# EAGLE board Analog Speed Controller (EAGLE 9.7.0)

Size 176.98 x 64.78 mm. Coordinates in mm from the lower left corner, seen from the top.
Outline: 0,0 176.98,0 176.98,64.78 0,64.78 0,0
Copper layers (1*16): Top 0.035mm / dielectric 1.5mm / Bottom 0.035mm
Design rules "default": minimum track width 6mil, minimum drill 0.35mm, track to track 6mil, track to pad 6mil, pad to pad 6mil, via to via 6mil, smd to smd 6mil, copper to edge 40mil, drill to drill 6mil, minimum pad ring 10mil, minimum via ring 8mil, stop-mask expansion 4mil, vias tented up to drill 0mil, thermal gap 10mil

## Footprints (pad centres in the part's own frame; a part is rotated, then mirrored left to right if it is on the bottom)
CAPPRD254W65D500H1150B = drill 0.85 pad 1.45: 1 -1.27,0; 2 1.27,0
DIODE-AXIAL = drill 1: 1 -5.08,0; 2 5.08,0
MOTOR = drill 1.118 pad 3.15 octagon: + 2.54,0; - -2.54,0
BATTERY-GENERIC = drill 1.118 pad 3.15 octagon: + 2.54,0; - -2.54,0
RESAD1016W63L850D250B = drill 0.83 pad 1.43: 1 -5.08,0; 2 5.08,0
TO220BV = drill 1.016 long: D 0,-2.54; G -2.54,-2.54; S 2.54,-2.54
TO92 = drill 0.813 octagon: 1 -1.27,0; 2 0,1.905; 3 1.27,0
DIP826W53P254L959H508Q8B = drill 0.786 pad 1.386: 1 -4.13,3.81; 2 -4.13,1.27; 3 -4.13,-1.27; 4 -4.13,-3.81; 5 4.13,-3.81; 6 4.13,-1.27; 7 4.13,1.27; 8 4.13,3.81

## Placement (x,y rotation side)
C1  1000u  [CAPPRD254W65D500H1150B]  39.19,29.29 0 top
DFLYBACK_DIODE  DIODEDIODE-AXIAL  [DIODE-AXIAL]  166.19,31.83 0 top
M1  MOTOR_HDR  [MOTOR]  168.73,39.45 0 top
P1  BATTERYGENERIC  [BATTERY-GENERIC]  8.26,56.53 180 top
R1  1k  [RESAD1016W63L850D250B]  89.99,16.59 0 top
R2  610  [RESAD1016W63L850D250B]  84.91,8.97 90 top
R3  10k  [RESAD1016W63L850D250B]  133.17,24.21 90 top
T1  NMOSFET  [TO220BV]  135.71,41.99 0 top
U1  TMP36GT9Z_TO92  [TO92]  59.51,39.45 0 top
UNON-INVERTING_OP_AMP  OPAMP_DIP  [DIP826W53P254L959H508Q8B]  86.18,25.48 90 top

## Library data of the parts
C1 DFLYBACK_DIODE M1 P1 R1-R3 U1 UNON-INVERTING_OP_AMP = Tinkercad
T1 = Tinkercad; CATEGORY: Transistor; SUB-CATEGORY: MOSFET; TYPE: N-Channel

## Nets
M1_-: DFLYBACK_DIODE.1 M1.- T1.D
P1+: C1.1 DFLYBACK_DIODE.2 M1.+ P1.+ U1.3 UNON-INVERTING_OP_AMP.7
P1-: C1.2 P1.- R2.1 R3.1 T1.S U1.1 UNON-INVERTING_OP_AMP.1 UNON-INVERTING_OP_AMP.4 UNON-INVERTING_OP_AMP.5
U1_VOUT: U1.2 UNON-INVERTING_OP_AMP.3
UNON-INVERTING_OP_AMP_-IN: R1.1 R2.2 UNON-INVERTING_OP_AMP.2
UNON-INVERTING_OP_AMP_OUT: R1.2 R3.2 T1.G UNON-INVERTING_OP_AMP.6

## Tracks (layer width: path | path; a pad name or v marks a point on that pad's centre or on a via)
M1_-  (2 unrouted)
P1+  (5 unrouted)
P1-  (8 unrouted)
U1_VOUT  (1 unrouted)
UNON-INVERTING_OP_AMP_-IN  (2 unrouted)
UNON-INVERTING_OP_AMP_OUT  (3 unrouted)